# Altium PCB 1.28inchLCD.PcbDoc
Units mil, origin at the board's own origin, x right, y up, seen from the top; angles counter-clockwise.
Board outline 1401.37 x 1346.43 mil, 2 copper layers (Top Layer, Bottom Layer); 11 components, 14 nets, 55 pads, 69 vias.
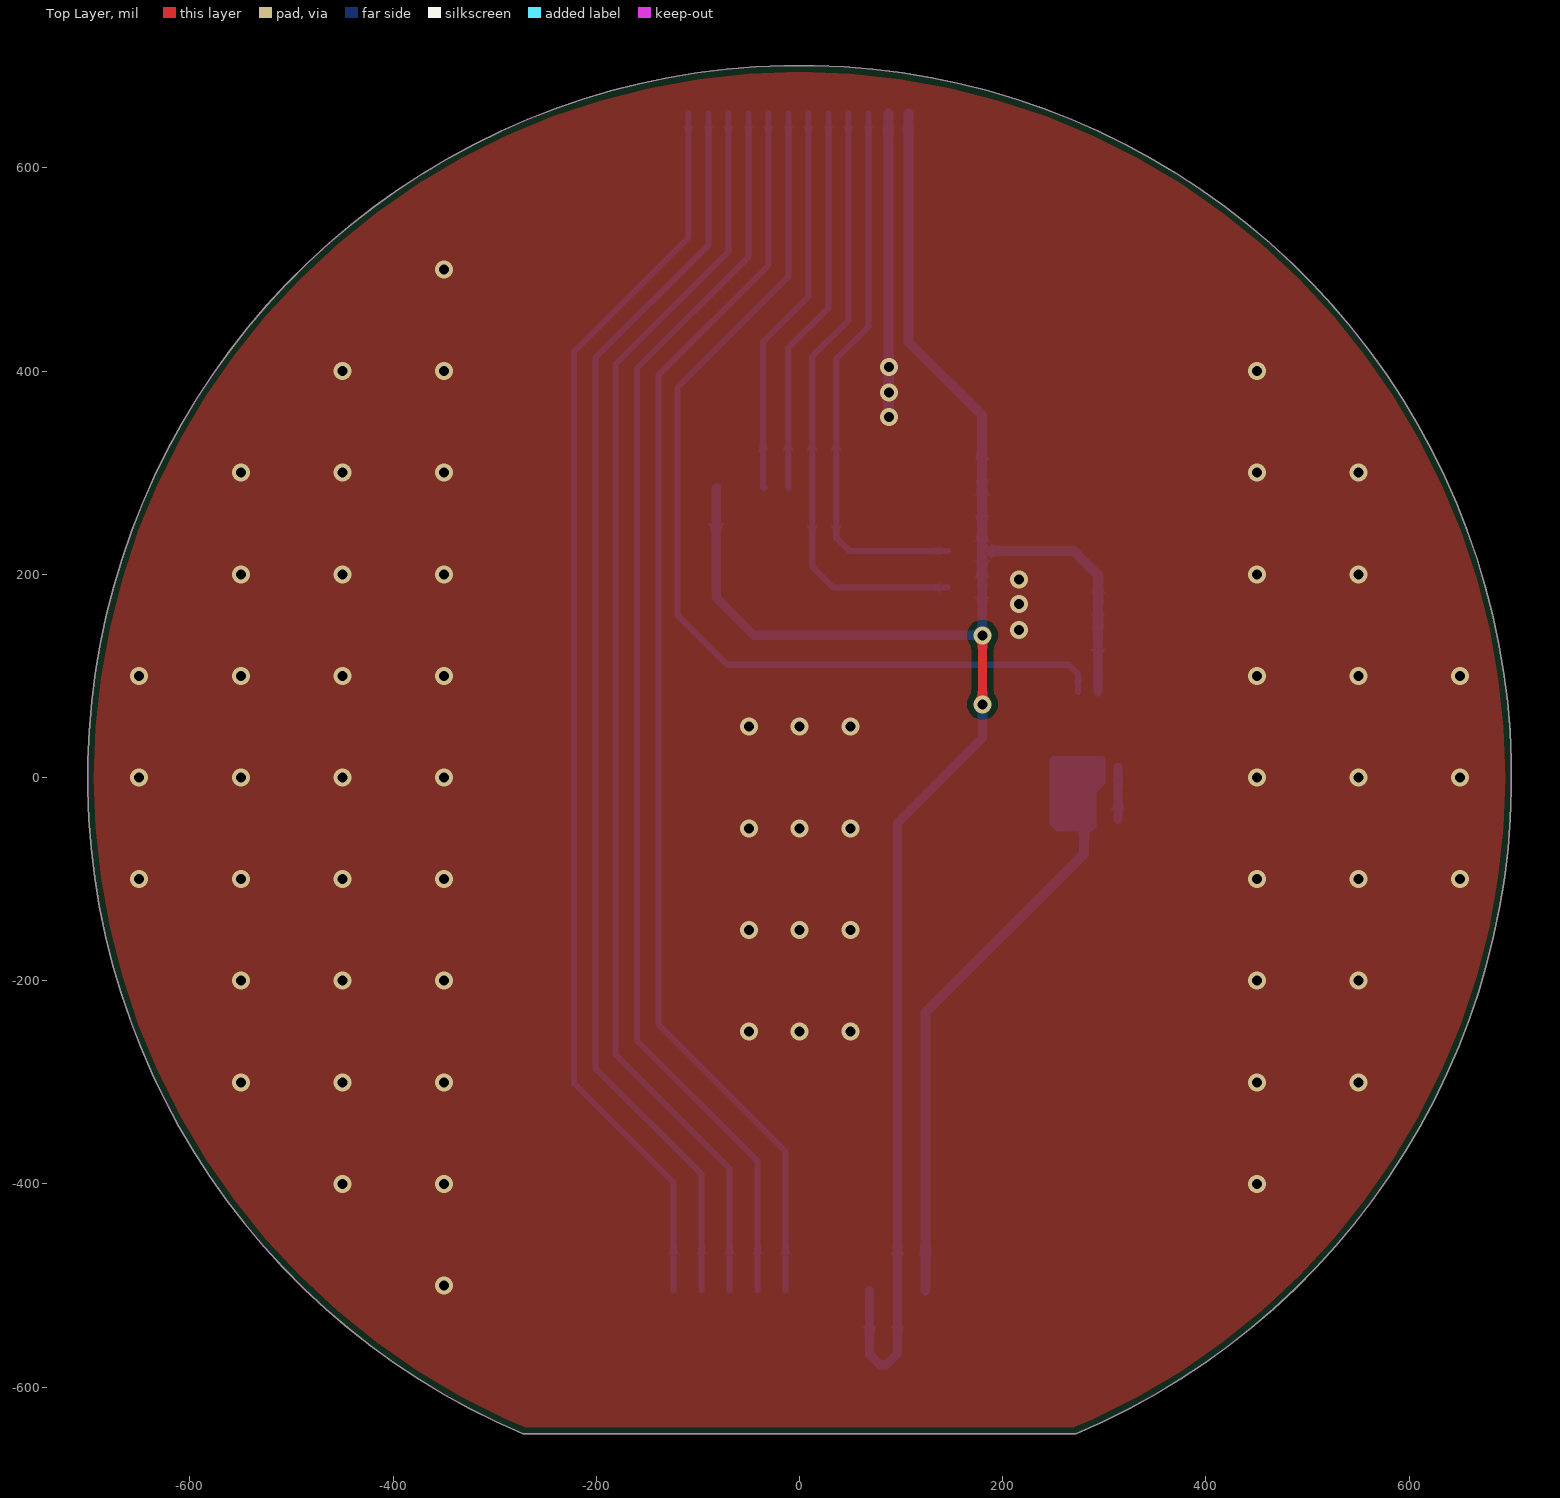
[diagram p0: Top Layer view]
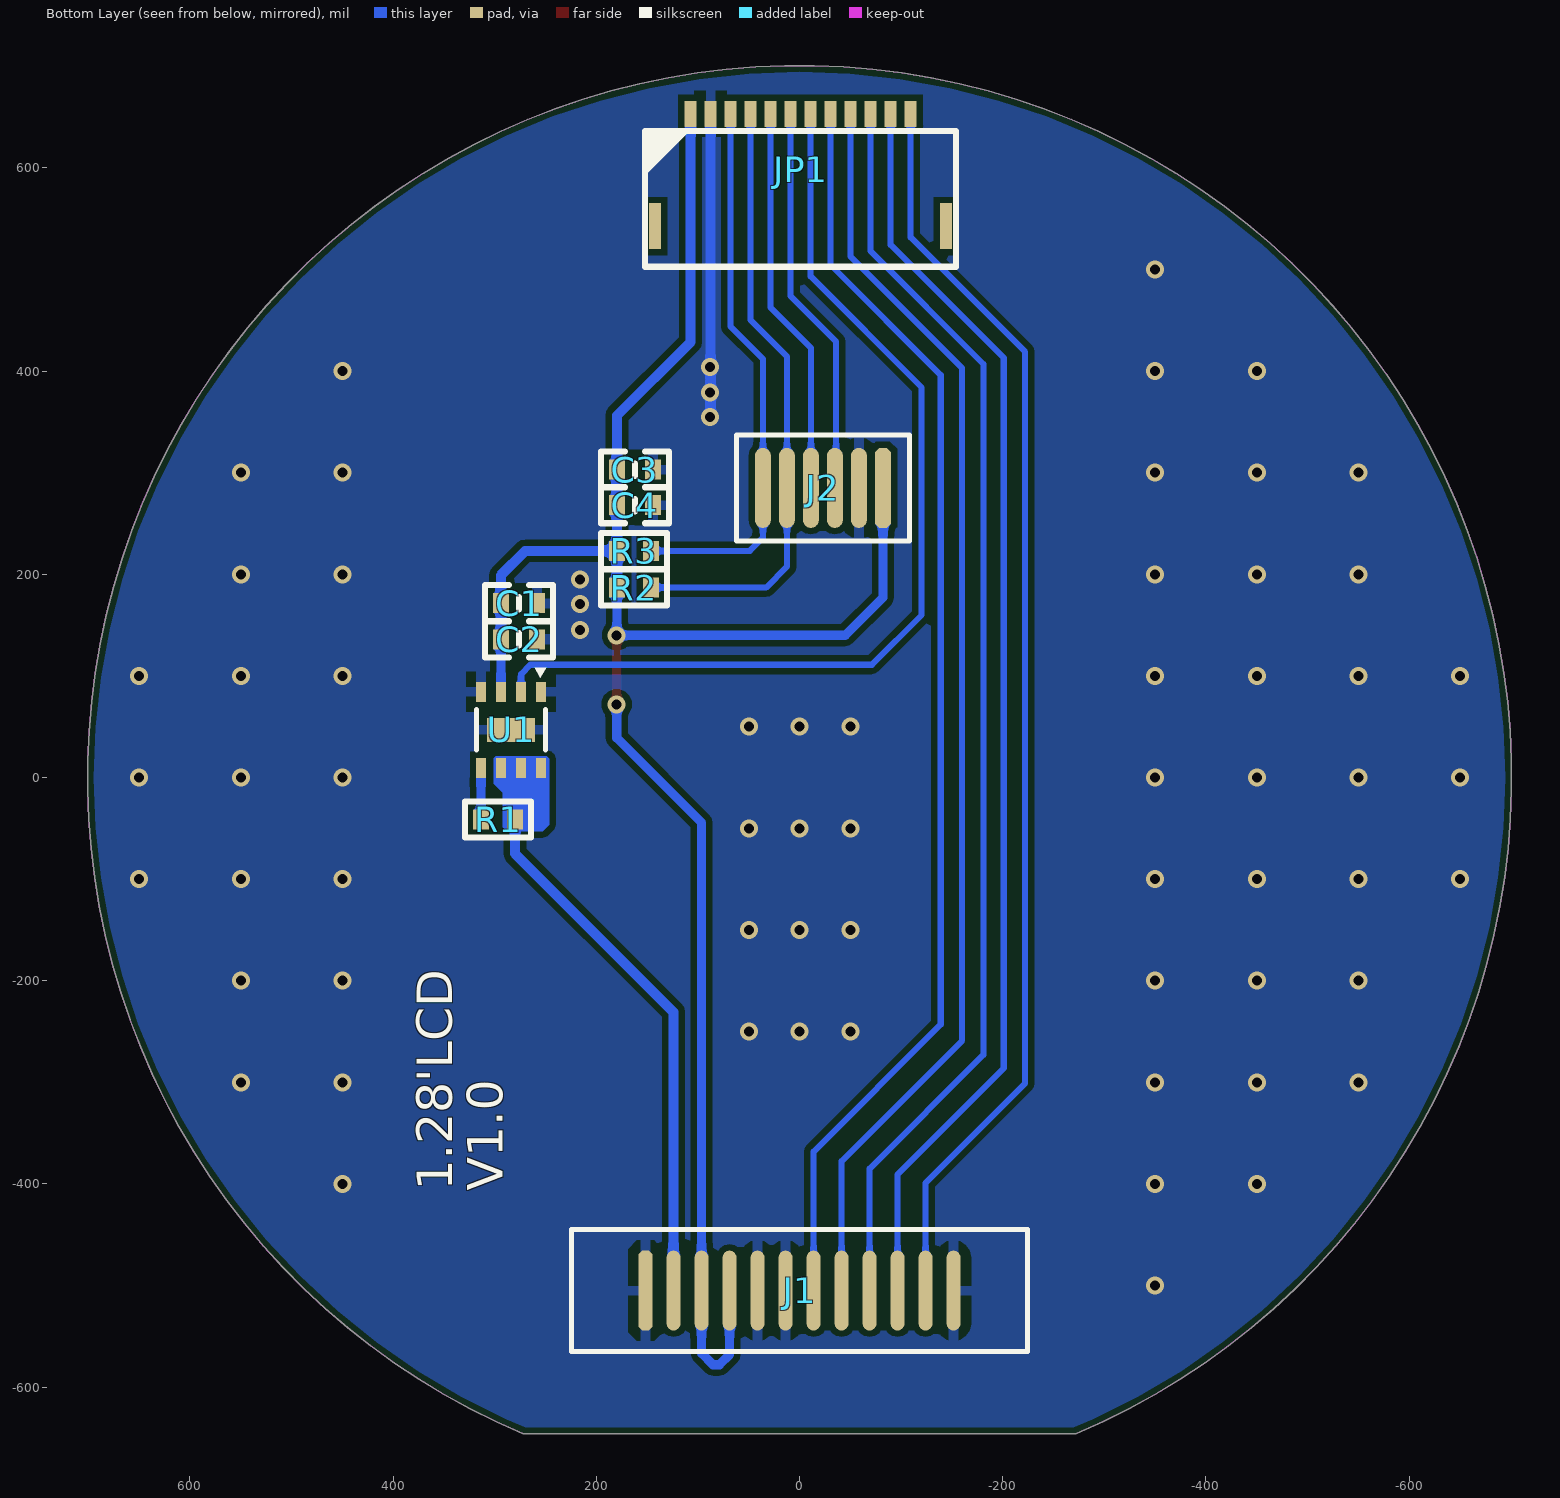
[diagram p1: Bottom Layer view, seen from below]
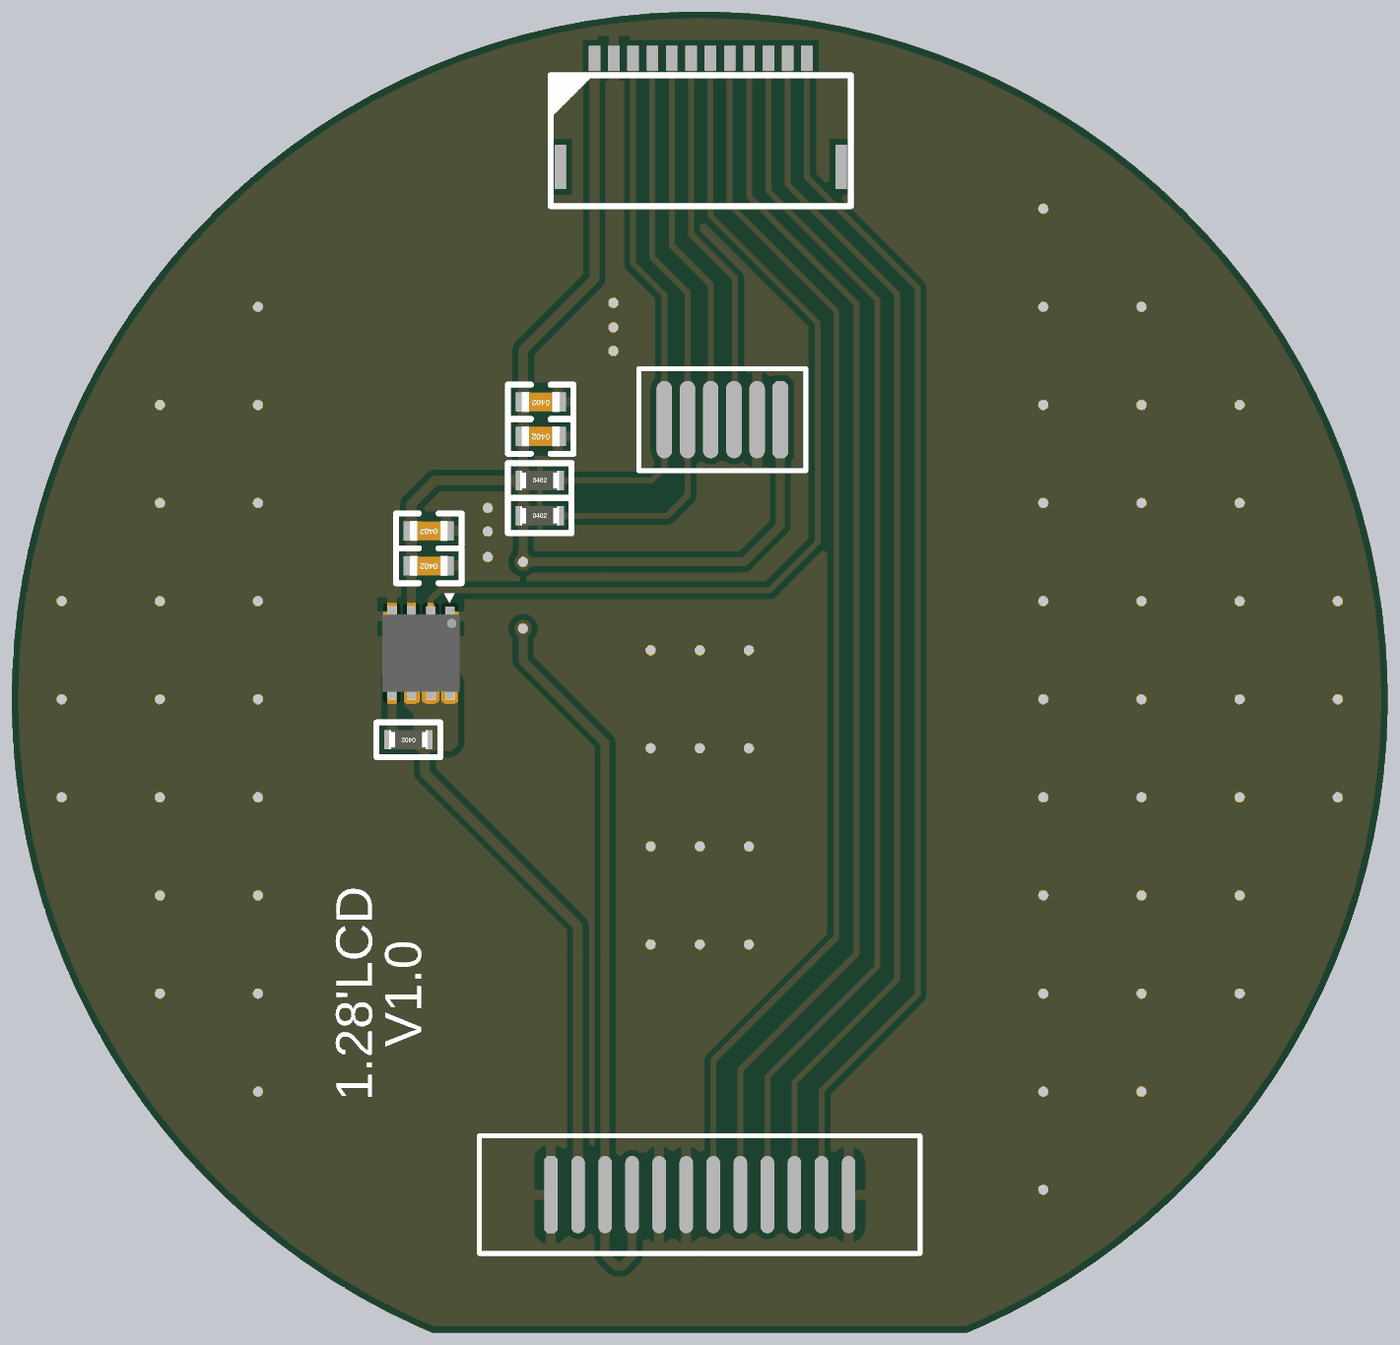
[diagram p2: 3D render of the assembled board from below, using the file's embedded part models]

## Layer stack, top to bottom
Top Solder: solder mask 0.4, Solder Resist, Dk 3.5
Top Layer: signal copper 1.4
Dielectric 1: dielectric 12.6, FR-4, Dk 4.8
Bottom Layer: signal copper 1.4
Bottom Solder: solder mask 0.4, Solder Resist, Dk 3.5

## Board outline
-272.14,-645.79 cw(c0,0) 272.13,-645.79

## Design rules (kind name [scope] priority, off if disabled: settings)
Clearance [All] p1: gap=6 ignorepadtopadclearanceinfootprint=FALSE
MinimumSolderMaskSliver [All] p1: minsoldermaskwidth=0
PolygonConnect [All] p1: thpad.connectstyle=Relief thpad.reliefconductorwidth=10 thpad.reliefentries=4 thpad.polygonreliefangle="90 Angle" thpad.airgapwidth=10 smdpad.connectstyle=Relief smdpad.reliefconductorwidth=10 smdpad.reliefentries=4 smdpad.polygonreliefangle="90 Angle" smdpad.airgapwidth=10 via.connectstyle=Direct via.reliefconductorwidth=10 via.reliefentries=4 via.polygonreliefangle="90 Angle" via.airgapwidth=10
RoutingVias [All] p1: holewidth=9.84 width=17.72 viastyle="Through Hole" minholewidth=9.84 minwidth=17.72 maxholewidth=23.62 maxwidth=31.5
SilkToSilkClearance [All] p1: silktosilkclearance=0
SilkToSolderMaskClearance [IsPad] p1: minsilkscreentomaskgap=0 clearancetoexposedcopper=TRUE
SolderMaskExpansion [IsVia] p1: expansion=4 istentingtop=TRUE useseparateexpansions=TRUE expansionbottom=4 istentingbottom=TRUE
Width [All] p1: maxlimit=30 minlimit=6 preferedwidth=6
27 further rules are at their usual default settings.

## Components (designator, comment, footprint, x,y, rotation, side; value= is the part's Value field where it differs from the comment)
C1 "4.7uF" C0402_L 276.05,171.63 r0 bottom
C2 "0.1uF" C0402_L 276.05,135.98 r0 bottom
C3 "4.7uF" C0402_L 162,303 r0 bottom
C4 "0.1uF" C0402_L 162,268 r0 bottom
J1 "1.28'LCD" 1.28‘LCD 0,-505 r0 bottom
J2 "1.28'Touch" 1.28’Touch -23,285 r0 bottom
JP1 "12P-FPC-1.0H" FPC05-10-12-RL-MA-G -1,598 r180 bottom
R1 "NC/0R" R0402_L 296.79,-41.35 r0 bottom
R2 "4.7K" R0402_L 163,187 r180 bottom
R3 "4.7K" R0402_L 163,223 r180 bottom
U1 "AW9364DNR" DFN2X2-8L 284,47 r270 bottom

## Footprints (in the part's own frame and the unit in brackets; to place one, negate y for a bottom-side part, rotate by r counter-clockwise, add the part's x,y. Pads: shape width x height; smd on the part's side, far side on the other; paste and mask are expansions set on the pad)
1.28‘LCD [mm]
  oct 0.35x2 smd: 1(3.85,0)
  oval 0.35x2 smd: 2(3.15,0) 3(2.45,0) 4(1.75,0) 5(1.05,0) 6(0.35,0) 7(-0.35,0) 8(-1.05,0) 9(-1.75,0) 10(-2.45,0) 11(-3.15,0) 12(-3.85,0)
  silkscreen extent -5.7,-1.52 5.7,1.52
1.28’Touch [mm]
  oct 0.4x2 smd: 1(-1.5,0)
  oval 0.4x2 smd: 2(-0.9,0) 3(-0.3,0) 4(0.3,0) 5(0.9,0) 6(1.5,0)
  silkscreen extent -2.16,-1.32 2.16,1.32
C0402_L [mm] "无极性贴片电容"
  rect 0.4x0.5 smd: 1(-0.45,0) 2(0.45,0)
  silkscreen extent -0.85,-0.45 0.85,0.45, body extent -0.5,-0.26 0.5,0.26, height 0.54
DFN2X2-8L [mm]
  rect 0.5x0.24 smd mask+0.102: 1(-0.95,0.75) 2(-0.95,0.25) 3(-0.95,-0.25) 4(-0.95,-0.75) 5(0.95,-0.75) 6(0.95,-0.25) 7(0.95,0.25) 8(0.95,0.75)
  rect 0.6x1.2 smd mask+0.102: 9(0,0)
  silkscreen extent -1.55,-0.86 0.51,0.88, body extent -1,-1 1,1, height 0.75
FPC05-10-12-RL-MA-G [mm]
  rect 0.3x1.15 smd: 0(-3.635,-1.405) 0(3.635,-1.405)
  rect 0.3x0.65 smd: 1(-2.75,1.405) 2(-2.25,1.405) 3(-1.75,1.405) 4(-1.25,1.405) 5(-0.75,1.405) 6(-0.25,1.405) 7(0.25,1.405) 8(0.75,1.405) 9(1.25,1.405) 10(1.75,1.405) 11(2.25,1.405) 12(2.75,1.405)
  silkscreen extent -3.88,-2.42 3.88,0.97
R0402_L [mm] "1/16W贴片电阻"
  rect 0.4x0.5 smd: 1(-0.425,0) 2(0.425,0)
  silkscreen extent -0.82,-0.45 0.83,0.45, body extent -0.5,-0.25 0.5,0.25, height 0.3

## Part data
C1 C2 C3 C4: library part C, "贴片电容", BOM名称=无极性贴片电容, 联系卖家，免费查找封装=唯一出售店铺网址https://shop463601444.taobao.com
J1: "1.28寸焊接LCD屏（240*240）"
J2: "1.28寸触摸面板"
JP1: library part "Header 12", BOM名称=12P连接器, 联系卖家 免费技术支持=封装库来自淘宝卖家ID：黄晶宝石, 联系卖家 免费查找封装=唯一出售店铺网址https://shop463601444.taobao.com
R1 R2 R3: library part R, "贴片电阻", BOM名称=贴片电阻, 联系卖家，免费查找封装=唯一出售店铺网址https://shop463601444.taobao.com
U1: "并联调光背光驱动"

## Via types
v1: diameter 17.72, hole 9.84, Top Layer to Bottom Layer, tented both sides, 69 vias

## Nets (pads, with @x,y where several pads share a name; then routed paths per layer and width w, separated by ;. In a path a pad name is that pad's centre, name@x,y a point inside that pad or via, vN(x,y) a via of type N, cw(c..) or ccw(c..) an arc to the next point about the centre after c; other vN are vias at no path point)
GND: C1.1 C2.1 C3.1 C4.1 J1.1 J1.5 J1.6 J1.12 J2.2 JP1.2 U1.1 U1.4 U1.9 | length 298.5
  Bottom Layer w10: JP1.2 87.58,355.42 v1(88,355)
  other v1: -350,-500 -450,-400 -350,-400 450,-400 -550,-300 -450,-300 -350,-300 450,-300 550,-300 -50,-250 0,-250 50,-250 -550,-200 -450,-200 -350,-200 450,-200 550,-200 -50,-150 0,-150 50,-150 -650,-100 -550,-100 -450,-100 -350,-100 450,-100 550,-100 650,-100 -50,-50 0,-50 50,-50 -650,0 -550,0 -450,0 -350,0 450,0 550,0 650,0 -50,50 0,50 50,50 -650,100 -550,100 -450,100 -350,100 450,100 550,100 650,100 216,145 216,171 216,195 -550,200 -450,200 -350,200 450,200 550,200 -550,300 -450,300 -350,300 450,300 550,300 88,379 -450,400 -350,400 450,400 88,404 -350,500
LCD_BL: JP1.7 U1.2 | length 974.3
  Bottom Layer w6: JP1.7 -10.84,493.16 -120,384 -120,159.81 -71.19,111 265,111 274.16,101.84 U1.2
LCD_CS: J1.8 JP1.9 | length 1252.9
  Bottom Layer w6: JP1.9 -50.21,512.79 -160,403 -160,-259 -41.34,-377.66 J1.8
LCD_DC: J1.7 JP1.8 | length 1255.1
  Bottom Layer w6: JP1.8 -30.53,504.47 -139,396 -139,-243 -13.78,-368.22 J1.7
LCD_RST: J1.11 JP1.12 | length 1245.6
  Bottom Layer w6: J1.11 -124.02,-398.98 -222,-301 -222,419 -109.27,531.73 JP1.12
LCD_SCL: J1.9 JP1.10 | length 1250.8
  Bottom Layer w6: JP1.10 -69.9,518.1 -181,407 -181,-273 -68.9,-385.1 J1.9
LCD_SDA: J1.10 JP1.11 | length 1247.8
  Bottom Layer w6: J1.10 -96.46,-390.54 -201,-286 -201,413 -89.58,524.42 JP1.11
NetR1_2: R1.2 U1.5 | length 50.9
  Bottom Layer w9: R1.2 U1.5
TP_INT: J2.4 JP1.5 | length 384.8
  Bottom Layer w6: J2.4 -11.19,422.81 28.53,462.53 JP1.5
TP_RST: J2.3 JP1.6 | length 387.4
  Bottom Layer w6: J2.3 -36,286.19 -36,429 8.84,473.84 JP1.6
TP_SCL: J2.6 JP1.3 R3.2 | length 546.1
  Bottom Layer w6: JP1.3 67.9,443.9 36.06,412.06 J2.6 36.06,235.94 49,223 R3.2
TP_SDA: J2.5 JP1.4 R2.2 | length 602.9
  Bottom Layer w6: JP1.4 48.21,450.21 12.43,414.43 J2.5 12.43,207.57 33,187 R2.2
VCC_3V3: C1.2 C2.2 C3.2 C4.2 J1.3 J1.4 J2.1 JP1.1 R2.1 R3.1 U1.3 | length 2008.2
  Top Layer w9: v1(180,72) v1(180,140)
  Bottom Layer w9: J2.1 -82.06,177.06 -45,140 v1(180,140) 179.87,140.13 179.87,186.87 R2.1 ; J1.4 68.9,-567.85 78.96,-577.91 85.17,-577.91 96.46,-566.63 J1.3 96.46,-44.54 180,39 v1(180,72) ; C2.2 C2.2 U1.3 U1.3
  Bottom Layer w10: JP1.1 107.27,428.73 179.71,356.29 C3.2 C4.2 ; R2.1 R3.1 ; C4.2 R3.1 ; C2.2 C1.2 294,171.87 294,199 270,223 R3.1
VLED_K: J1.2 R1.1 U1.6 U1.7 U1.8 | length 528.3
  Bottom Layer w10: J1.2 124.02,-230.98 280.06,-74.94 R1.1
pads on no net: JP1.0

## Polygon pours and split planes (outlines as drawn)
GND on Top Layer "GND_L01_P000" (solid, remove dead copper, pour order 0): -721,718 -721,-708 717,-708 717,717
GND on Bottom Layer "GND_L02_P001" (solid, remove dead copper, pour order 1): -721,718 -721,-708 717,-708 717,717

## Keep-outs
Keep-Out Layer:
  lines w0.5: -272.14,-645.79 cw(c0,0) 272.13,-645.79 0,-645.79 -272.14,-645.79

## Other copper
Bottom Layer:
  region net VLED_K: 246.29,-46.29 253,-53 288,-53 292,-49 292,-15 301,-6 301,19 299.08,20.92 248.78,20.92 246.29,18.42

## Silkscreen, mask and mechanical layers (free items; w line width, h text height)
Bottom Overlay:
  text "V1.0" at 280.16,-406.6 h60 r270
  text "1.28'LCD" at 330.16,-406.6 h60 r270
Mechanical 1:
  lines w0.5: 272.13,-645.79 ccw(c0,0) -272.14,-645.79 272.13,-645.79 ; 272.13,-645.79 272.13,-645.79
Mechanical 2:
  circle w0.5: c0,0 r836.61
Mechanical 4:
  circle w0.5: c0,0 r700.79
  lines w0.5: -486.67,-504.24 -374.02,-700.79 0,-700.79 374.02,-700.79 486.67,-504.24
Mechanical 9:
  circle w0.25: c324.52,560.47 r0.12
  circle w0.25: c-324.52,-560.47 r0.12
  circle w0.25: c452.12,535.44 r0.12
  circle w0.25: c-452.12,-535.44 r0.12
  circle w0.25: c542.24,443.93 r0.12
  circle w0.25: c-542.24,-443.93 r0.12
  circle w0.25: c704.44,379.99 r0.12
  circle w0.25: c-704.44,-379.99 r0.12
  circle w0.25: c788.34,280.08 r0.12
  circle w0.25: c-788.34,-280.08 r0.12
  lines w0.5: 0,-466.54 0,-545.28 ; 0,246.06 0,324.8 ; 0,-545.28 -236.22,-545.28 -236.22,-466.54 236.22,-466.54 236.22,-545.28 0,-545.28 ; -236.22,246.06 236.22,246.06 236.22,324.8 -236.22,324.8 -236.22,246.06